# Altium PCB LoRa.PcbDoc
Units mm, origin at the board's own origin, x right, y up, seen from the top; angles counter-clockwise.
Board outline 45.84 x 31.11 mm, 2 copper layers (Top Layer, Bottom Layer); 3 components, 16 nets, 32 pads, 0 vias.
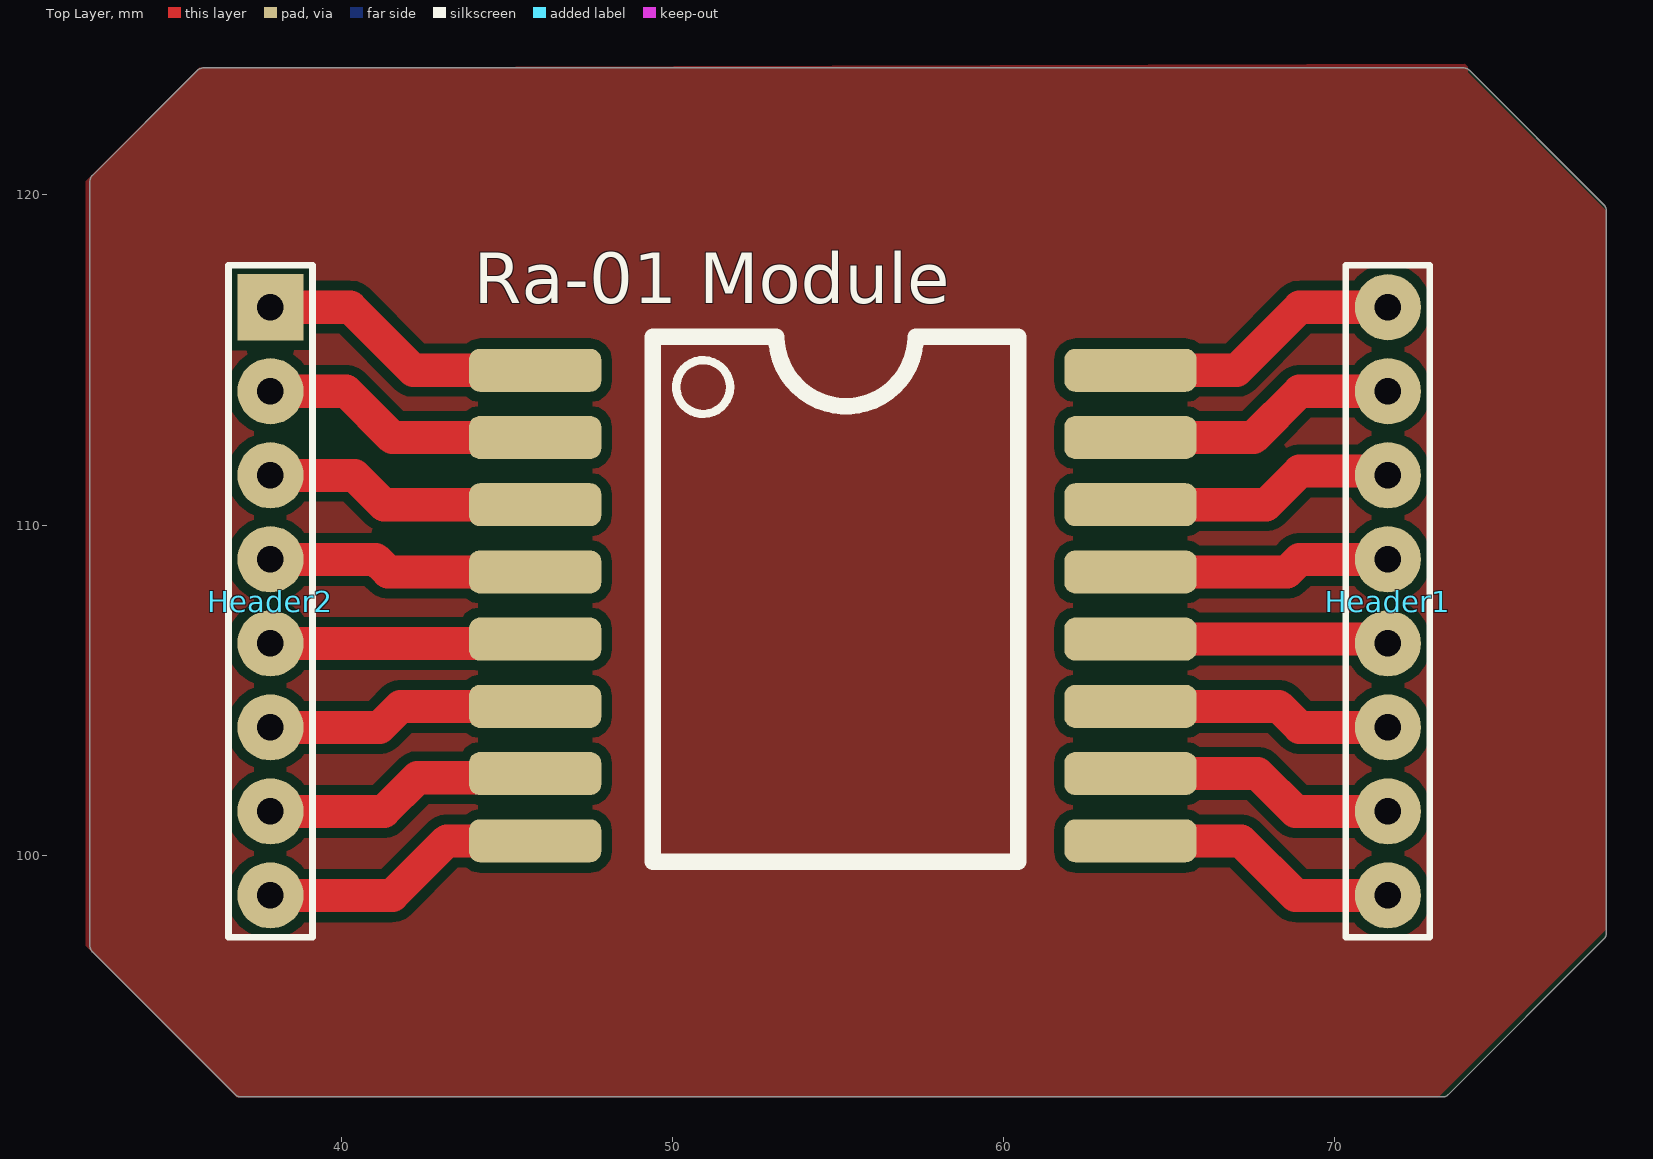
[diagram p0: Top Layer view]
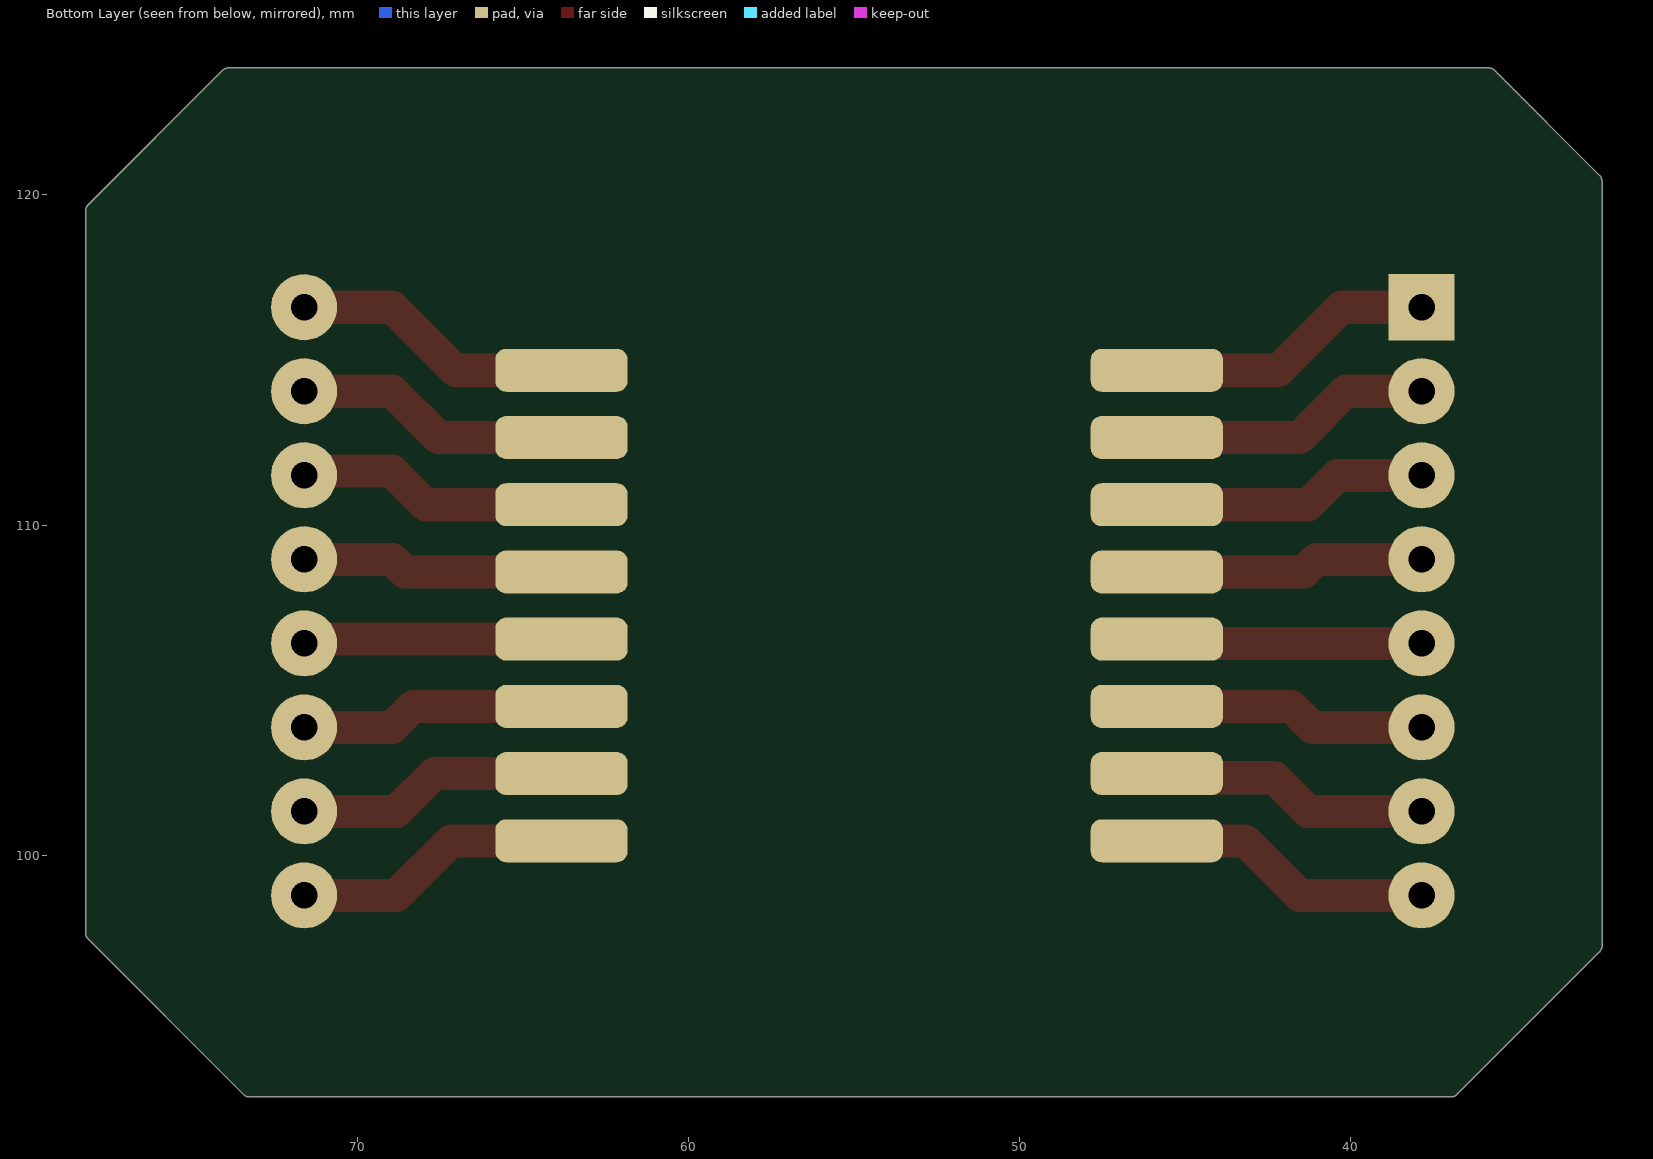
[diagram p1: Bottom Layer view, seen from below]

## Layer stack, top to bottom
Top Solder: solder mask 0.0102, Solder Resist, Dk 3.5
Top Layer: signal copper 0.0356
Dielectric 1: dielectric 0.32, FR-4, Dk 4.8
Bottom Layer: signal copper 0.0356
Bottom Solder: solder mask 0.0102, Solder Resist, Dk 3.5

## Board outline
32.462,97.105 cw(c32.639,97.282) 32.462,97.105 36.78,92.787 cw(c36.957,92.964) 36.78,92.787 ccw(c36.957,92.964) 36.957,92.714 73.279,92.714 ccw(c73.279,92.964) 73.456,92.787 78.155,97.486 cw(c77.978,97.663) 78.155,97.486 ccw(c77.978,97.663) 78.228,97.663 78.228,119.507 ccw(c77.978,119.507) 78.155,119.684 74.091,123.748 cw(c73.914,123.571) 74.091,123.748 ccw(c73.914,123.571) 73.914,123.821 35.814,123.821 ccw(c35.814,123.571) 35.637,123.748 cw(c35.814,123.571) 35.637,123.748 32.462,120.573 cw(c32.639,120.396) 32.462,120.573 ccw(c32.639,120.396) 32.389,120.396 32.389,97.282 ccw(c32.639,97.282)

## Design rules (kind name [scope] priority, off if disabled: settings)
Clearance Clearance_1 [All] p1: gap=0.3 ignorepadtopadclearanceinfootprint=FALSE
Clearance [InPolygon] p2: gap=0.3 ignorepadtopadclearanceinfootprint=FALSE
PolygonConnect [All] p1: connectstyle=Relief reliefconductorwidth=0.254 reliefentries=4 polygonreliefangle="90 Angle" airgapwidth=0.254
RoutingVias [All] p1: holewidth=0.8 width=2 viastyle="Through Hole" minholewidth=0.711 minwidth=1 maxholewidth=1 maxwidth=2
SolderMaskExpansion [All] p1: expansion=0.102
Width [All] p1: maxlimit=1.27 minlimit=0.254 preferedwidth=0.508
30 further rules are at their usual default settings.

## Components (designator, comment, footprint, x,y, rotation, side; value= is the part's Value field where it differs from the comment)
Header1 "" HDR1X8#1 71.628,116.586 r270 top
Header2 "" HDR1X8#2 37.846,98.806 r90 top
"Ra-01 Module" "Ra-01 Module" Ra-01 55.372,111.887 r0 top

## Footprints (in the part's own frame and the unit in brackets; to place one, negate y for a bottom-side part, rotate by r counter-clockwise, add the part's x,y. Pads: shape width x height; smd on the part's side, far side on the other; paste and mask are expansions set on the pad)
HDR1X8#1 [mm] "Connector; Header; 8 Position"
  round 2 hole 0.8: 1(0,0) 2(2.54,0) 3(5.08,0) 4(7.62,0) 5(10.16,0) 6(12.7,0) 7(15.24,0) 8(17.78,0)
  silkscreen extent -1.27,-1.27 19.05,1.27
HDR1X8#2 [mm] "Connector; Header; 8 Position"
  round 2 hole 0.8: 1(0,0) 2(2.54,0) 3(5.08,0) 4(7.62,0) 5(10.16,0) 6(12.7,0) 7(15.24,0)
  rect 2x2 hole 0.8: 8(17.78,0)
  silkscreen extent -1.27,-1.27 19.05,1.27
Ra-01 [mm]
  rrect50% 4x1.3 all layers, no hole: 1(-9.525,2.794) 2(-9.525,0.762) 3(-9.525,-1.27) 4(-9.525,-3.302) 5(-9.525,-5.334) 6(-9.525,-7.366) 7(-9.525,-9.398) 8(-9.525,-11.43) 9(8.475,-11.43) 10(8.475,-9.398) 11(8.475,-7.366) 12(8.475,-5.334) 13(8.475,-3.302) 14(8.475,-1.27) 15(8.475,0.762) 16(8.475,2.794)
  silkscreen extent -5.97,-12.06 5.08,3.81

## Part data
Header1 Header2: library part "Header 8", "Header, 8-Pin", LatestRevisionDate=17-Jul-2002, LatestRevisionNote="Re-released for DXP Platform.", Publisher="Altium Limited"

## Nets (pads, with @x,y where several pads share a name; then routed paths per layer and width w, separated by ;. In a path a pad name is that pad's centre, name@x,y a point inside that pad or via, vN(x,y) a via of type N, cw(c..) or ccw(c..) an arc to the next point about the centre after c; other vN are vias at no path point)
NetHeader1_1: "Ra-01 Module.16" Header1.1 | length 8.6
  Top Layer w1: 63.847,114.681 67.056,114.681 68.961,116.586 Header1.1
NetHeader1_2: "Ra-01 Module.15" Header1.2 | length 8.4
  Top Layer w1: 63.847,112.649 67.564,112.649 68.961,114.046 Header1.2
NetHeader1_3: "Ra-01 Module.14" Header1.3 | length 8.3
  Top Layer w1: 63.847,110.617 67.945,110.617 68.961,111.633 71.501,111.633 Header1.3
NetHeader1_4: "Ra-01 Module.13" Header1.4 | length 7.9
  Top Layer w1: 63.847,108.585 68.58,108.585 68.961,108.966 Header1.4
NetHeader1_5: "Ra-01 Module.12" Header1.5 | length 7.8
  Top Layer w1: 63.847,106.553 71.501,106.553 Header1.5
NetHeader1_6: "Ra-01 Module.11" Header1.6 | length 8
  Top Layer w1: 63.847,104.521 68.326,104.521 68.961,103.886 Header1.6
NetHeader1_7: "Ra-01 Module.10" Header1.7 | length 8.3
  Top Layer w1: 63.847,102.489 67.691,102.489 68.834,101.346 Header1.7
NetHeader1_8: "Ra-01 Module.9" Header1.8 | length 8.5
  Top Layer w1: 63.847,100.457 67.183,100.457 68.834,98.806 Header1.8
NetHeader2_1: "Ra-01 Module.8" Header2.1 | length 8.7
  Top Layer w1: Header2.1 41.529,98.806 43.18,100.457 45.847,100.457
NetHeader2_2: "Ra-01 Module.7" Header2.2 | length 8.5
  Top Layer w1: Header2.2 41.275,101.346 42.291,102.362 45.72,102.362 45.847,102.489
NetHeader2_3: "Ra-01 Module.6" Header2.3 | length 8.3
  Top Layer w1: Header2.3 41.148,103.886 41.783,104.521 45.847,104.521
NetHeader2_4: "Ra-01 Module.5" Header2.4 | length 8.1
  Top Layer w0.254: 45.72,106.426 45.847,106.553
  Top Layer w1: Header2.4 45.72,106.426
NetHeader2_5: "Ra-01 Module.4" Header2.5 | length 8.2
  Top Layer w1: Header2.5 41.021,108.966 41.402,108.585 45.847,108.585
NetHeader2_6: "Ra-01 Module.3" Header2.6 | length 8.4
  Top Layer w1: Header2.6 40.386,111.506 41.275,110.617 45.847,110.617
NetHeader2_7: "Ra-01 Module.2" Header2.7 | length 8.6
  Top Layer w1: Header2.7 40.132,114.046 41.529,112.649 45.847,112.649
NetHeader2_8: "Ra-01 Module.1" Header2.8 | length 8.8
  Top Layer w1: Header2.8 40.259,116.586 42.164,114.681 45.847,114.681

## Polygon pours and split planes (outlines as drawn)
no net on Top Layer (solid, pour order 56): 35.687,123.825 32.258,120.396 32.258,97.282 36.83,92.71 73.152,92.71 78.232,97.79 78.232,119.507 74.041,123.698 74.041,123.952